# Altium PCB mimx8mn1dvtjzaa.PcbDoc
Units mil, origin at the board's own origin, x right, y up, seen from the top; angles counter-clockwise.
Board outline 6000 x 4000 mil, 2 copper layers (Top Layer, Bottom Layer); 39 components, 35 nets, 966 pads, 0 vias.
Unrouted connection lines stored in the file: 276.
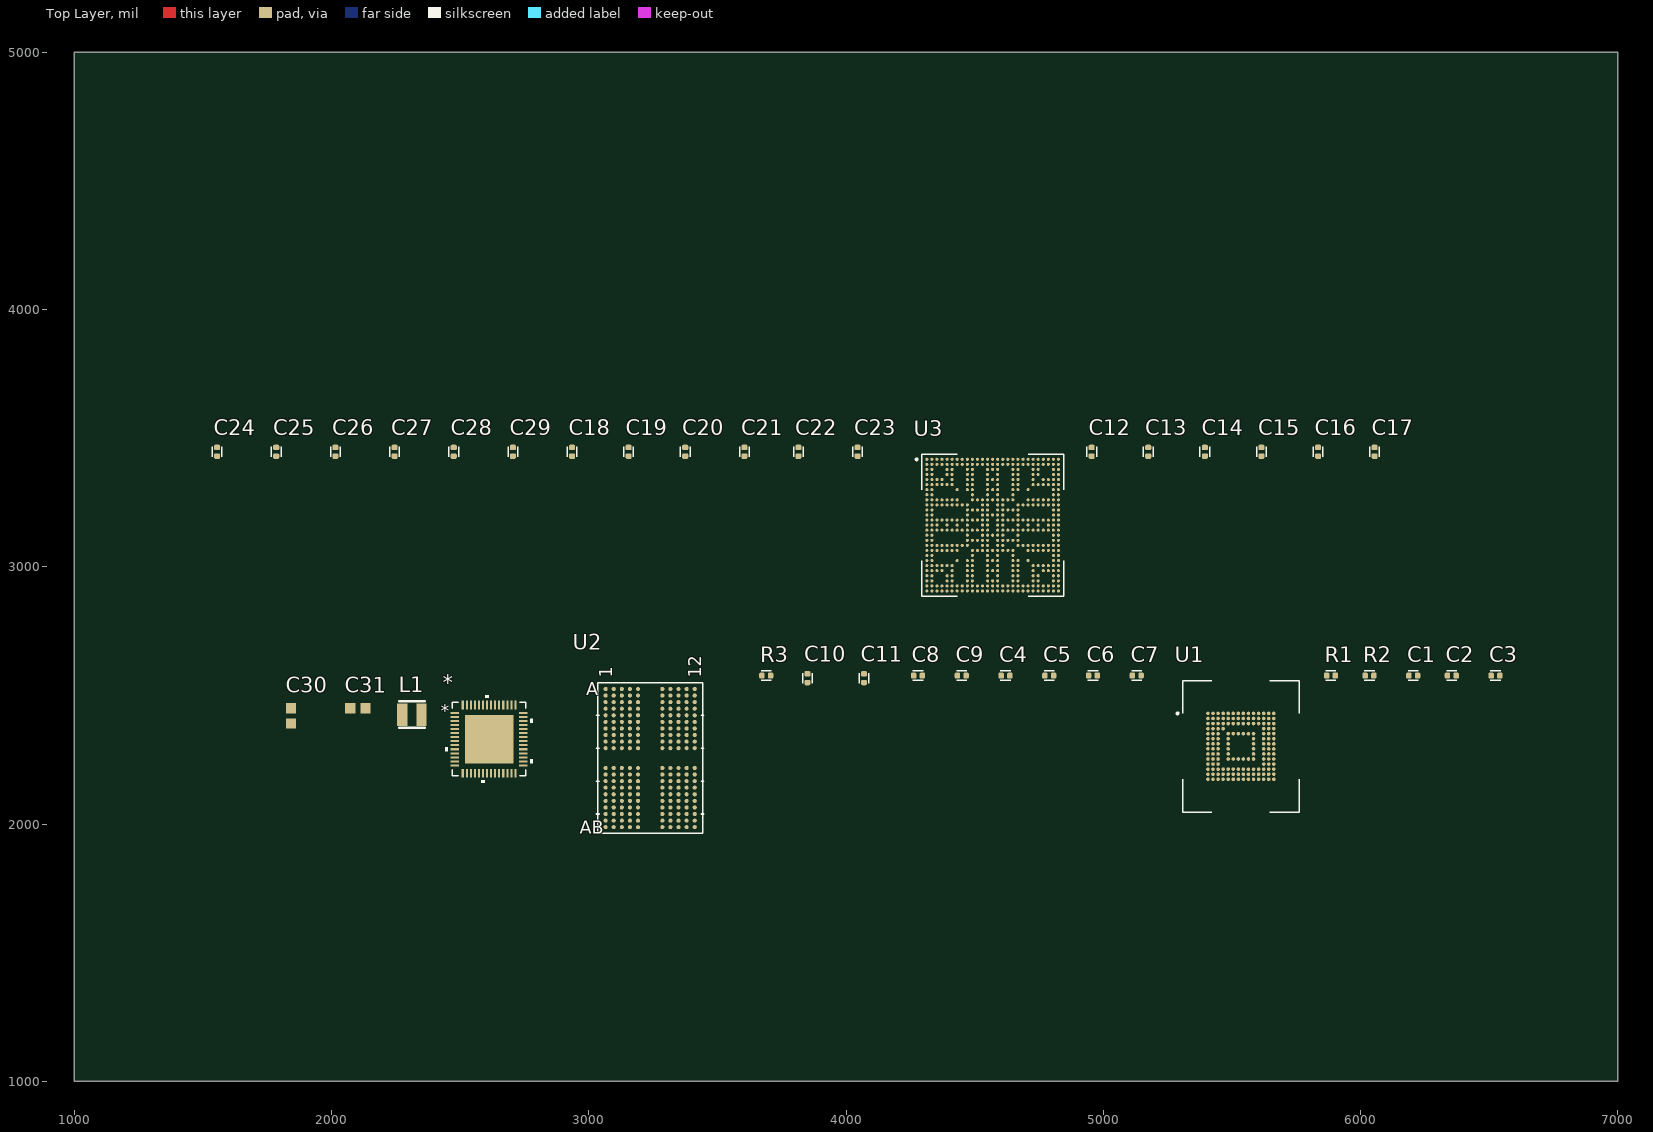
[diagram p0: Top Layer view]
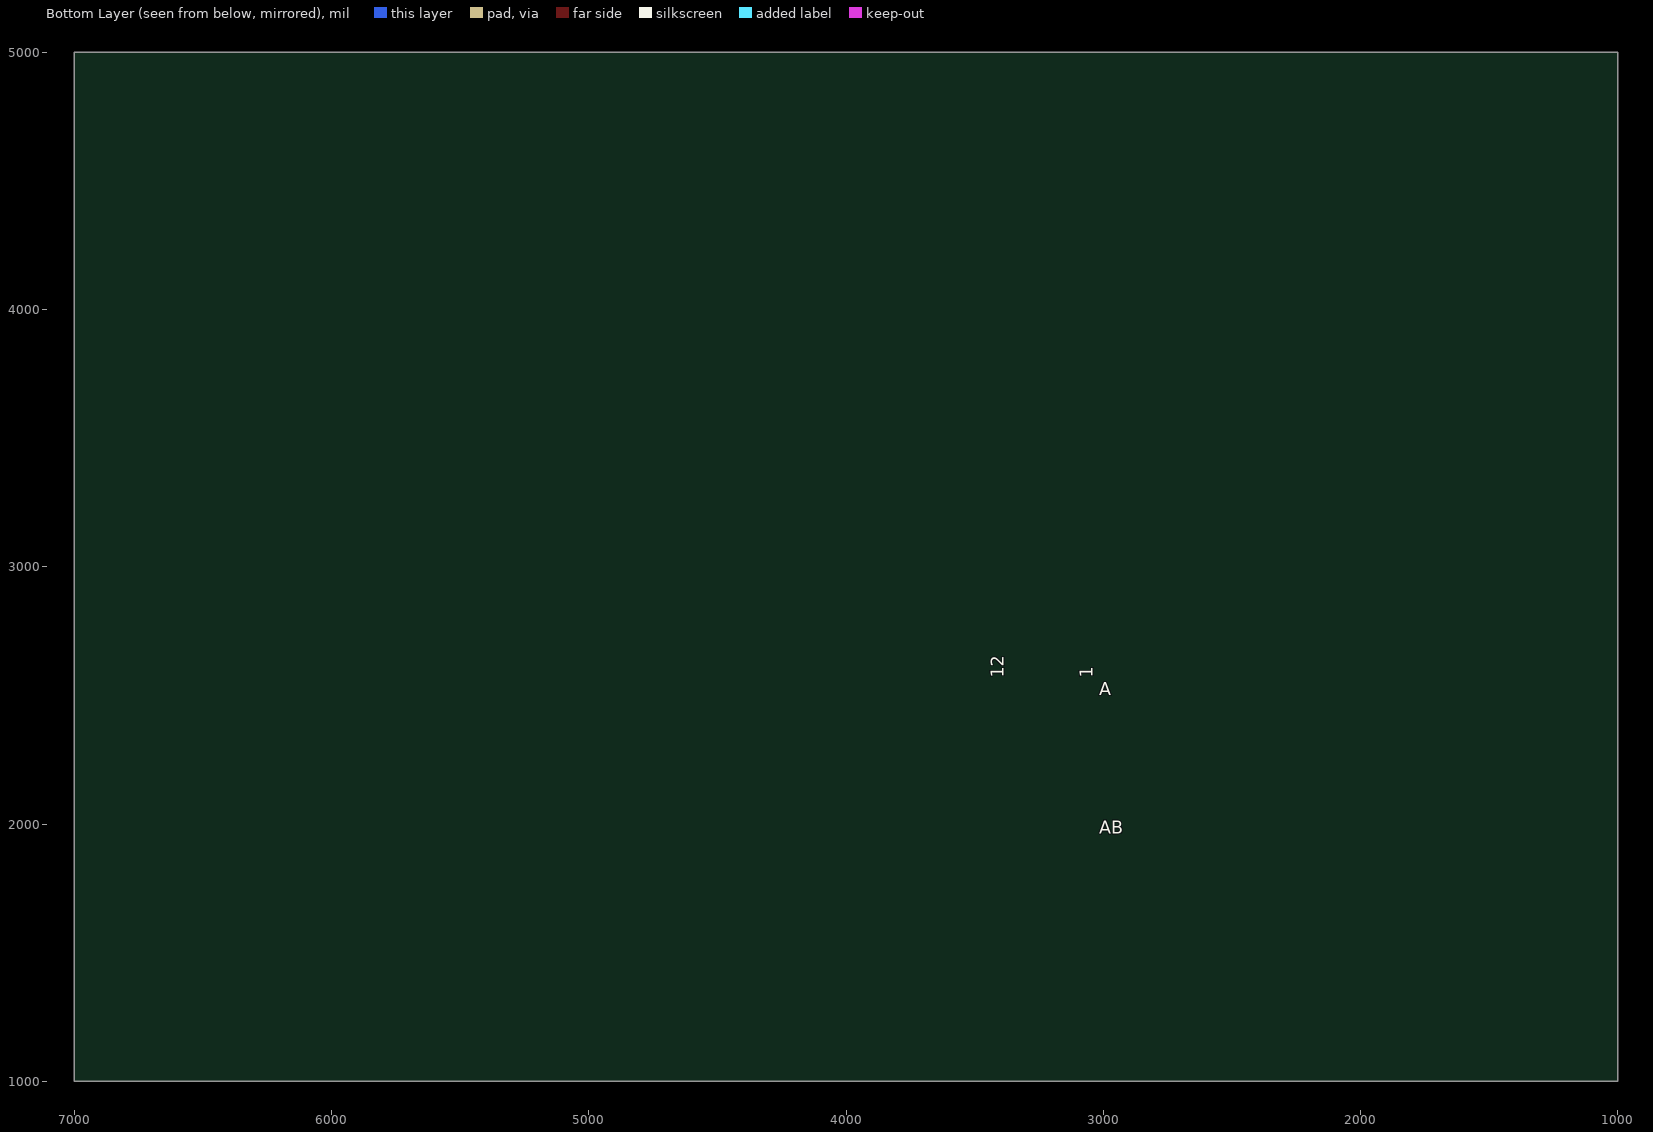
[diagram p1: Bottom Layer view, seen from below]

## Layer stack, top to bottom
Top Solder: solder mask 0.4, Solder Resist, Dk 3.5
Top Layer: signal copper 1.4
Dielectric 1: dielectric 12.6, FR-4, Dk 4.8
Bottom Layer: signal copper 1.4
Bottom Solder: solder mask 0.4, Solder Resist, Dk 3.5

## Board outline
1000,1000 7000,1000 7000,5000 1000,5000

## Design rules (kind name [scope] priority, off if disabled: settings)
Clearance [All] p1: gap=1 ignorepadtopadclearanceinfootprint=FALSE
PolygonConnect [All] p1: connectstyle=Relief reliefconductorwidth=10 reliefentries=4 polygonreliefangle="90 Angle" airgapwidth=10
RoomDefinition PMIC [InComponentClass('PMIC')] p1: confinementstyle=ConfineIn formatcopy=TRUE lockcomponents=FALSE outline 1802.42,2155 2787.42,2155 2787.42,2590 1802.42,2590
RoomDefinition mpu_power [InComponentClass('mpu_power')] p2: confinementstyle=ConfineIn formatcopy=TRUE lockcomponents=FALSE outline 1525,2836.93 6210,2836.93 6210,3586.93 1525,3586.93
RoomDefinition LPDDR4 [InComponentClass('LPDDR4')] p3: confinementstyle=ConfineIn formatcopy=TRUE lockcomponents=FALSE outline 2918.74,1946.31 3458.74,1946.31 3458.74,2756.3 2918.74,2756.3
RoomDefinition eMMC_QSPI [InComponentClass('eMMC_QSPI')] p4: confinementstyle=ConfineIn formatcopy=TRUE lockcomponents=FALSE outline 3650,1996.93 6620,1996.93 6620,2706.93 3650,2706.93
RoutingVias [All] p1: holewidth=28 width=50 viastyle="Through Hole" minholewidth=28 minwidth=50 maxholewidth=28 maxwidth=50
SolderMaskExpansion [All] p1: expansion=4 istentingtop=FALSE
Width [All] p1: maxlimit=5 minlimit=3 preferedwidth=5
30 further rules are at their usual default settings.

## Classes and differential pairs
component class PMIC: * C30 C31 L1
component class mpu_power: C12 C13 C14 C15 C16 C17 C18 C19 C20 C21 C22 C23 C24 C25 C26 C27 C28 C29 U3
component class LPDDR4: U2
component class eMMC_QSPI: C1 C2 C3 C4 C5 C6 C7 C8 C9 C10 C11 R1 R2 R3 TP16 TP17 TP18 TP34 TP35 TP36 TP40 U1 U5

## Components (designator, comment, footprint, x,y, rotation, side; value= is the part's Value field where it differs from the comment)
* "PCA9450BHNY" HVQFN56_SOT949-6_NXP 2612.42,2330 r0 top
C1 "475" CAPC1005X55N2 6205,2576.93 r0 top
C2 "475" CAPC1005X55N2 6355,2576.93 r0 top
C3 "475" CAPC1005X55N2 6525,2576.93 r0 top
C4 "475" CAPC1005X55N2 4620,2576.93 r0 top
C5 "475" CAPC1005X55N2 4790,2576.93 r0 top
C6 "475" CAPC1005X55N2 4960,2576.93 r0 top
C7 "475" CAPC1005X55N2 5130,2576.93 r0 top
C8 "475" CAPC1005X55N2 4280,2576.93 r0 top
C9 "475" CAPC1005X55N2 4450,2576.93 r0 top
C10 "104" CAPC1005X55N2 3850,2566.93 r90 top
C11 "104" CAPC1005X55N2 4070,2566.93 r90 top
C12 "105" RC0402 4955,3446.93 r90 top
C13 "105" RC0402 5175,3446.93 r90 top
C14 "105" RC0402 5395,3446.93 r90 top
C15 "105" RC0402 5615,3446.93 r90 top
C16 "105" RC0402 5835,3446.93 r90 top
C17 "106" CL05A106MQ5NUNC 6055,3446.93 r90 top
C18 "105" RC0402 2935,3446.93 r90 top
C19 "105" RC0402 3155,3446.93 r90 top
C20 "105" RC0402 3375,3446.93 r90 top
C21 "105" RC0402 3605,3446.93 r90 top
C22 "105" RC0402 3815,3446.93 r90 top
C23 "106" CL05A106MQ5NUNC 4045,3446.93 r90 top
C24 "105" RC0402 1555,3446.93 r90 top
C25 "105" RC0402 1785,3446.93 r90 top
C26 "105" RC0402 2015,3446.93 r90 top
C27 "105" RC0402 2245,3446.93 r90 top
C28 "105" RC0402 2475,3446.93 r90 top
C29 "106" CL05A106MQ5NUNC 2705,3446.93 r90 top
C30 "22uF 10v" CAPC1608X100N 1842.42,2420 r90 top
C31 "22uF 10v" CAPC1608X100N 2102.42,2450 r0 top
L1 "DFE252012PD-R47M=P2" IND-SMD_L2.5-W2.0_SWPA252012S 2312.42,2425 r0 top
R1 "10k" RC0402X 5885,2576.93 r0 top
R2 "10k" RC0402X 6035,2576.93 r0 top
R3 "10k" RC0402X 3690,2576.93 r0 top
U1 "SDINBDG4-16G_VFBGA_153P" BGA153N50P14X14_1300X1150X80 5535,2301.93 r0 top
U2 "MT53E256M16D1FW-046 AIT:B" TFBGA200_10X14P5X1P1_FW_MRN-M 3238.74,2256.3 r0 top
U3 "MIMX8MN6DVTJZAA" BGA486N50P27X27_1400X1400X125N 4570,3161.93 r0 top

## Footprints (in the part's own frame and the unit in brackets; to place one, negate y for a bottom-side part, rotate by r counter-clockwise, add the part's x,y. Pads: shape width x height; smd on the part's side, far side on the other; paste and mask are expansions set on the pad)
BGA153N50P14X14_1300X1150X80 [mm]
  round 0.35 smd: A1(-3.25,3.25) A2(-2.75,3.25) A3(-2.25,3.25) A4(-1.75,3.25) A5(-1.25,3.25) A6(-0.75,3.25) A7(-0.25,3.25) A8(0.25,3.25) A9(0.75,3.25) A10(1.25,3.25) A11(1.75,3.25) A12(2.25,3.25) A13(2.75,3.25) A14(3.25,3.25) B1(-3.25,2.75) B2(-2.75,2.75) B3(-2.25,2.75) B4(-1.75,2.75) B5(-1.25,2.75) B6(-0.75,2.75) B7(-0.25,2.75) B8(0.25,2.75) B9(0.75,2.75) B10(1.25,2.75) B11(1.75,2.75) B12(2.25,2.75) B13(2.75,2.75) B14(3.25,2.75) C1(-3.25,2.25) C2(-2.75,2.25) C3(-2.25,2.25) C4(-1.75,2.25) C5(-1.25,2.25) C6(-0.75,2.25) C7(-0.25,2.25) C8(0.25,2.25) C9(0.75,2.25) C10(1.25,2.25) C11(1.75,2.25) C12(2.25,2.25) C13(2.75,2.25) C14(3.25,2.25) D1(-3.25,1.75) D2(-2.75,1.75) D3(-2.25,1.75) D4(-1.75,1.75) D12(2.25,1.75) D13(2.75,1.75) D14(3.25,1.75) E1(-3.25,1.25) E2(-2.75,1.25) E3(-2.25,1.25) E5(-1.25,1.25) E6(-0.75,1.25) E7(-0.25,1.25) E8(0.25,1.25) E9(0.75,1.25) E10(1.25,1.25) E12(2.25,1.25) E13(2.75,1.25) E14(3.25,1.25) F1(-3.25,0.75) F2(-2.75,0.75) F3(-2.25,0.75) F5(-1.25,0.75) F10(1.25,0.75) F12(2.25,0.75) F13(2.75,0.75) F14(3.25,0.75) G1(-3.25,0.25) G2(-2.75,0.25) G3(-2.25,0.25) G5(-1.25,0.25) G10(1.25,0.25) G12(2.25,0.25) G13(2.75,0.25) G14(3.25,0.25) H1(-3.25,-0.25) H2(-2.75,-0.25) H3(-2.25,-0.25) H5(-1.25,-0.25) H10(1.25,-0.25) H12(2.25,-0.25) H13(2.75,-0.25) H14(3.25,-0.25) J1(-3.25,-0.75) J2(-2.75,-0.75) J3(-2.25,-0.75) J5(-1.25,-0.75) J10(1.25,-0.75) J12(2.25,-0.75) J13(2.75,-0.75) J14(3.25,-0.75) K1(-3.25,-1.25) K2(-2.75,-1.25) K3(-2.25,-1.25) K5(-1.25,-1.25) K6(-0.75,-1.25) K7(-0.25,-1.25) K8(0.25,-1.25) K9(0.75,-1.25) K10(1.25,-1.25) K12(2.25,-1.25) K13(2.75,-1.25) K14(3.25,-1.25) L1(-3.25,-1.75) L2(-2.75,-1.75) L3(-2.25,-1.75) L12(2.25,-1.75) L13(2.75,-1.75) L14(3.25,-1.75) M1(-3.25,-2.25) M2(-2.75,-2.25) M3(-2.25,-2.25) M4(-1.75,-2.25) M5(-1.25,-2.25) M6(-0.75,-2.25) M7(-0.25,-2.25) M8(0.25,-2.25) M9(0.75,-2.25) M10(1.25,-2.25) M11(1.75,-2.25) M12(2.25,-2.25) M13(2.75,-2.25) M14(3.25,-2.25) N1(-3.25,-2.75) N2(-2.75,-2.75) N3(-2.25,-2.75) N4(-1.75,-2.75) N5(-1.25,-2.75) N6(-0.75,-2.75) N7(-0.25,-2.75) N8(0.25,-2.75) N9(0.75,-2.75) N10(1.25,-2.75) N11(1.75,-2.75) N12(2.25,-2.75) N13(2.75,-2.75) N14(3.25,-2.75) P1(-3.25,-3.25) P2(-2.75,-3.25) P3(-2.25,-3.25) P4(-1.75,-3.25) P5(-1.25,-3.25) P6(-0.75,-3.25) P7(-0.25,-3.25) P8(0.25,-3.25) P9(0.75,-3.25) P10(1.25,-3.25) P11(1.75,-3.25) P12(2.25,-3.25) P13(2.75,-3.25) P14(3.25,-3.25)
  silkscreen extent -6.35,-6.5 5.75,6.5
BGA486N50P27X27_1400X1400X125N [mil]
  round 12 smd mask+0: A1(-255.91,255.91) A2(-236.22,255.91) A3(-216.54,255.91) A4(-196.85,255.91) A5(-177.17,255.91) A6(-157.48,255.91) A7(-137.8,255.91) A8(-118.11,255.91) A9(-98.43,255.91) A10(-78.74,255.91) A11(-59.06,255.91) A12(-39.37,255.91) A13(-19.69,255.91) A14(0,255.91) A15(19.69,255.91) A16(39.37,255.91) A17(59.06,255.91) A18(78.74,255.91) A19(98.43,255.91) A20(118.11,255.91) A21(137.8,255.91) A22(157.48,255.91) A23(177.17,255.91) A24(196.85,255.91) A25(216.54,255.91) A26(236.22,255.91) A27(255.91,255.91) AA1(-255.91,-137.8) AA2(-236.22,-137.8) AA7(-137.8,-137.8) AA9(-98.43,-137.8) AA10(-78.74,-137.8) AA13(-19.69,-137.8) AA14(0,-137.8) AA15(19.69,-137.8) AA18(78.74,-137.8) AA19(98.43,-137.8) AA21(137.8,-137.8) AA26(236.22,-137.8) AA27(255.91,-137.8) AB1(-255.91,-157.48) AB2(-236.22,-157.48) AB3(-216.54,-157.48) AB4(-196.85,-157.48) AB5(-177.17,-157.48) AB6(-157.48,-157.48) AB9(-98.43,-157.48) AB10(-78.74,-157.48) AB13(-19.69,-157.48) AB15(19.69,-157.48) AB18(78.74,-157.48) AB19(98.43,-157.48) AB22(157.48,-157.48) AB23(177.17,-157.48) AB24(196.85,-157.48) AB25(216.54,-157.48) AB26(236.22,-157.48) AB27(255.91,-157.48) AC1(-255.91,-177.17) AC2(-236.22,-177.17) AC3(-216.54,-177.17) AC4(-196.85,-177.17) AC6(-157.48,-177.17) AC9(-98.43,-177.17) AC10(-78.74,-177.17) AC13(-19.69,-177.17) AC14(0,-177.17) AC15(19.69,-177.17) AC18(78.74,-177.17) AC19(98.43,-177.17) AC22(157.48,-177.17) AC24(196.85,-177.17) AC25(216.54,-177.17) AC26(236.22,-177.17) AC27(255.91,-177.17) AD1(-255.91,-196.85) AD2(-236.22,-196.85) AD5(-177.17,-196.85) AD6(-157.48,-196.85) AD9(-98.43,-196.85) AD10(-78.74,-196.85) AD13(-19.69,-196.85) AD15(19.69,-196.85) AD18(78.74,-196.85) AD19(98.43,-196.85) AD22(157.48,-196.85) AD23(177.17,-196.85) AD26(236.22,-196.85) AD27(255.91,-196.85) AE1(-255.91,-216.54) AE2(-236.22,-216.54) AE5(-177.17,-216.54) AE6(-157.48,-216.54) AE9(-98.43,-216.54) AE10(-78.74,-216.54) AE13(-19.69,-216.54) AE14(0,-216.54) AE15(19.69,-216.54) AE18(78.74,-216.54) AE19(98.43,-216.54) AE22(157.48,-216.54) AE23(177.17,-216.54) AE26(236.22,-216.54) AE27(255.91,-216.54) AF1(-255.91,-236.22) AF2(-236.22,-236.22) AF3(-216.54,-236.22) AF4(-196.85,-236.22) AF5(-177.17,-236.22) AF6(-157.48,-236.22) AF7(-137.8,-236.22) AF8(-118.11,-236.22) AF9(-98.43,-236.22) AF10(-78.74,-236.22) AF11(-59.06,-236.22) AF12(-39.37,-236.22) AF13(-19.69,-236.22) AF14(0,-236.22) AF15(19.69,-236.22) AF16(39.37,-236.22) AF17(59.06,-236.22) AF18(78.74,-236.22) AF19(98.43,-236.22) AF20(118.11,-236.22) AF21(137.8,-236.22) AF22(157.48,-236.22) AF23(177.17,-236.22) AF24(196.85,-236.22) AF25(216.54,-236.22) AF26(236.22,-236.22) AF27(255.91,-236.22) AG1(-255.91,-255.91) AG2(-236.22,-255.91) AG3(-216.54,-255.91) AG4(-196.85,-255.91) AG5(-177.17,-255.91) AG6(-157.48,-255.91) AG7(-137.8,-255.91) AG8(-118.11,-255.91) AG9(-98.43,-255.91) AG10(-78.74,-255.91) AG11(-59.06,-255.91) AG12(-39.37,-255.91) AG13(-19.69,-255.91) AG14(0,-255.91) AG15(19.69,-255.91) AG16(39.37,-255.91) AG17(59.06,-255.91) AG18(78.74,-255.91) AG19(98.43,-255.91) AG20(118.11,-255.91) AG21(137.8,-255.91) AG22(157.48,-255.91) AG23(177.17,-255.91) AG24(196.85,-255.91) AG25(216.54,-255.91) AG26(236.22,-255.91) AG27(255.91,-255.91) B1(-255.91,236.22) B2(-236.22,236.22) B3(-216.54,236.22) B4(-196.85,236.22) B5(-177.17,236.22) B6(-157.48,236.22) B7(-137.8,236.22) B8(-118.11,236.22) B9(-98.43,236.22) B10(-78.74,236.22) B11(-59.06,236.22) B12(-39.37,236.22) B13(-19.69,236.22) B14(0,236.22) B15(19.69,236.22) B16(39.37,236.22) B17(59.06,236.22) B18(78.74,236.22) B19(98.43,236.22) B20(118.11,236.22) B21(137.8,236.22) B22(157.48,236.22) B23(177.17,236.22) B24(196.85,236.22) B25(216.54,236.22) B26(236.22,236.22) B27(255.91,236.22) C1(-255.91,216.54) C2(-236.22,216.54) C5(-177.17,216.54) C6(-157.48,216.54) C9(-98.43,216.54) C10(-78.74,216.54) C13(-19.69,216.54) C14(0,216.54) C15(19.69,216.54) C18(78.74,216.54) C19(98.43,216.54) C22(157.48,216.54) C23(177.17,216.54) C26(236.22,216.54) C27(255.91,216.54) D1(-255.91,196.85) D2(-236.22,196.85) D5(-177.17,196.85) D6(-157.48,196.85) D9(-98.43,196.85) D10(-78.74,196.85) D13(-19.69,196.85) D15(19.69,196.85) D18(78.74,196.85) D19(98.43,196.85) D22(157.48,196.85) D23(177.17,196.85) D26(236.22,196.85) D27(255.91,196.85) E1(-255.91,177.17) E2(-236.22,177.17) E3(-216.54,177.17) E4(-196.85,177.17) E6(-157.48,177.17) E9(-98.43,177.17) E10(-78.74,177.17) E13(-19.69,177.17) E14(0,177.17) E15(19.69,177.17) E18(78.74,177.17) E19(98.43,177.17) E22(157.48,177.17) E24(196.85,177.17) E25(216.54,177.17) E26(236.22,177.17) E27(255.91,177.17) F1(-255.91,157.48) F2(-236.22,157.48) F3(-216.54,157.48) F4(-196.85,157.48) F5(-177.17,157.48) F6(-157.48,157.48) F9(-98.43,157.48) F10(-78.74,157.48) F13(-19.69,157.48) F15(19.69,157.48) F18(78.74,157.48) F19(98.43,157.48) F22(157.48,157.48) F23(177.17,157.48) F24(196.85,157.48) F25(216.54,157.48) F26(236.22,157.48) F27(255.91,157.48) G1(-255.91,137.8) G2(-236.22,137.8) G7(-137.8,137.8) G9(-98.43,137.8) G10(-78.74,137.8) G13(-19.69,137.8) G14(0,137.8) G15(19.69,137.8) G18(78.74,137.8) G19(98.43,137.8) G21(137.8,137.8) G26(236.22,137.8) G27(255.91,137.8) H1(-255.91,118.11) H2(-236.22,118.11) H10(-78.74,118.11) H13(-19.69,118.11) H15(19.69,118.11) H18(78.74,118.11) H26(236.22,118.11) H27(255.91,118.11) J1(-255.91,98.43) J2(-236.22,98.43) J3(-216.54,98.43) J4(-196.85,98.43) J5(-177.17,98.43) J6(-157.48,98.43) J7(-137.8,98.43) J10(-78.74,98.43) J11(-59.06,98.43) J12(-39.37,98.43) J13(-19.69,98.43) J14(0,98.43) J15(19.69,98.43) J16(39.37,98.43) J17(59.06,98.43) J18(78.74,98.43) J21(137.8,98.43) J22(157.48,98.43) J23(177.17,98.43) J24(196.85,98.43) J25(216.54,98.43) J26(236.22,98.43) J27(255.91,98.43) K1(-255.91,78.74) K2(-236.22,78.74) K3(-216.54,78.74) K4(-196.85,78.74) K5(-177.17,78.74) K6(-157.48,78.74) K7(-137.8,78.74) K8(-118.11,78.74) K9(-98.43,78.74) K12(-39.37,78.74) K13(-19.69,78.74) K15(19.69,78.74) K16(39.37,78.74) K19(98.43,78.74) K20(118.11,78.74) K21(137.8,78.74) K22(157.48,78.74) K23(177.17,78.74) K24(196.85,78.74) K25(216.54,78.74) K26(236.22,78.74) K27(255.91,78.74) L1(-255.91,59.06) L2(-236.22,59.06) L9(-98.43,59.06) L10(-78.74,59.06) L11(-59.06,59.06) L12(-39.37,59.06) L13(-19.69,59.06) L15(19.69,59.06) L16(39.37,59.06) L17(59.06,59.06) L18(78.74,59.06) L19(98.43,59.06) L26(236.22,59.06) L27(255.91,59.06) M1(-255.91,39.37) M2(-236.22,39.37) M9(-98.43,39.37) M12(-39.37,39.37) M13(-19.69,39.37) M14(0,39.37) M15(19.69,39.37) M16(39.37,39.37) M19(98.43,39.37) M26(236.22,39.37) M27(255.91,39.37) N1(-255.91,19.68) N2(-236.22,19.68) N3(-216.54,19.68) N4(-196.85,19.68) N5(-177.17,19.68) N6(-157.48,19.68) N7(-137.8,19.68) N8(-118.11,19.68) N9(-98.43,19.68) N10(-78.74,19.68) N11(-59.06,19.68) N12(-39.37,19.68) N13(-19.69,19.68) N15(19.69,19.68) N16(39.37,19.68) N17(59.06,19.68) N18(78.74,19.68) N19(98.43,19.68) N20(118.11,19.68) N21(137.8,19.68) N22(157.48,19.68) N23(177.17,19.68) N24(196.85,19.68) N25(216.54,19.68) N26(236.22,19.68) N27(255.91,19.68) P1(-255.91,0) P2(-236.22,0) P3(-216.54,0) P5(-177.17,0) P7(-137.8,0) P9(-98.43,0) P12(-39.37,0) P13(-19.69,0) P15(19.69,0) P16(39.37,0) P19(98.43,0) P21(137.8,0) P23(177.17,0) P25(216.54,0) P26(236.22,0) P27(255.91,0) R1(-255.91,-19.68) R2(-236.22,-19.68) R3(-216.54,-19.68) R4(-196.85,-19.68) R5(-177.17,-19.68) R6(-157.48,-19.68) R7(-137.8,-19.68) R8(-118.11,-19.68) R9(-98.43,-19.68) R10(-78.74,-19.68) R11(-59.06,-19.68) R12(-39.37,-19.68) R13(-19.69,-19.68) R15(19.69,-19.68) R16(39.37,-19.68) R17(59.06,-19.68) R18(78.74,-19.68) R19(98.43,-19.68) R20(118.11,-19.68) R21(137.8,-19.68) R22(157.48,-19.68) R23(177.17,-19.68) R24(196.85,-19.68) R25(216.54,-19.68) R26(236.22,-19.68) R27(255.91,-19.68) T1(-255.91,-39.37) T2(-236.22,-39.37) T9(-98.43,-39.37) T12(-39.37,-39.37) T13(-19.69,-39.37) T14(0,-39.37) T15(19.69,-39.37) T16(39.37,-39.37) T19(98.43,-39.37) T26(236.22,-39.37) T27(255.91,-39.37) U1(-255.91,-59.06) U2(-236.22,-59.06) U9(-98.43,-59.06) U10(-78.74,-59.06) U11(-59.06,-59.06) U12(-39.37,-59.06) U13(-19.69,-59.06) U15(19.69,-59.06) U16(39.37,-59.06) U17(59.06,-59.06) U18(78.74,-59.06) U19(98.43,-59.06) U26(236.22,-59.06) U27(255.91,-59.06) V1(-255.91,-78.74) V2(-236.22,-78.74) V3(-216.54,-78.74) V4(-196.85,-78.74) V5(-177.17,-78.74) V6(-157.48,-78.74) V7(-137.8,-78.74) V8(-118.11,-78.74) V9(-98.43,-78.74) V12(-39.37,-78.74) V13(-19.69,-78.74) V15(19.69,-78.74) V16(39.37,-78.74) V19(98.43,-78.74) V20(118.11,-78.74) V21(137.8,-78.74) V22(157.48,-78.74) V23(177.17,-78.74) V24(196.85,-78.74) V25(216.54,-78.74) V26(236.22,-78.74) V27(255.91,-78.74) W1(-255.91,-98.43) W2(-236.22,-98.43) W3(-216.54,-98.43) W4(-196.85,-98.43) W5(-177.17,-98.43) W6(-157.48,-98.43) W7(-137.8,-98.43) W10(-78.74,-98.43) W11(-59.06,-98.43) W12(-39.37,-98.43) W13(-19.69,-98.43) W14(0,-98.43) W15(19.69,-98.43) W16(39.37,-98.43) W17(59.06,-98.43) W18(78.74,-98.43) W21(137.8,-98.43) W22(157.48,-98.43) W23(177.17,-98.43) W24(196.85,-98.43) W25(216.54,-98.43) W26(236.22,-98.43) W27(255.91,-98.43) Y1(-255.91,-118.11) Y2(-236.22,-118.11) Y10(-78.74,-118.11) Y13(-19.69,-118.11) Y15(19.69,-118.11) Y18(78.74,-118.11) Y26(236.22,-118.11) Y27(255.91,-118.11)
  silkscreen extent -299,-276 276,276
CAPC1005X55N2 [mm]
  rrect53% 0.54x0.6 smd: 1(-0.43,0) 2(0.43,0)
  silkscreen extent -0.5,-0.48 0.5,0.48, body extent -0.52,-0.28 0.52,0.28, height 0.56
CAPC1608X100N [mm]
  rect 1x1.02 smd: 1(-0.759,0) 2(0.759,0)
  body extent -0.8,-0.4 0.8,0.4, height 1
CL05A106MQ5NUNC [mm]
  rrect53% 0.54x0.6 smd: 1(-0.43,0) 2(0.43,0)
  silkscreen extent -0.5,-0.48 0.5,0.48
HVQFN56_SOT949-6_NXP [mil]
  rect 34x8 smd paste+0 mask+0: 1(-133,102.36) 2(-133,86.61) 3(-133,70.87) 4(-133,55.12) 5(-133,39.37) 6(-133,23.62) 7(-133,7.87) 8(-133,-7.87) 9(-133,-23.62) 10(-133,-39.37) 11(-133,-55.12) 12(-133,-70.87) 13(-133,-86.61) 14(-133,-102.36) 29(133,-102.36) 30(133,-86.61) 31(133,-70.87) 32(133,-55.12) 33(133,-39.37) 34(133,-23.62) 35(133,-7.87) 36(133,7.87) 37(133,23.62) 38(133,39.37) 39(133,55.12) 40(133,70.87) 41(133,86.61) 42(133,102.36)
  rect 8x34 smd paste+0 mask+0: 15(-102.36,-133) 16(-86.61,-133) 17(-70.87,-133) 18(-55.12,-133) 19(-39.37,-133) 20(-23.62,-133) 21(-7.87,-133) 22(7.87,-133) 23(23.62,-133) 24(39.37,-133) 25(55.12,-133) 26(70.87,-133) 27(86.61,-133) 28(102.36,-133) 43(102.36,133) 44(86.61,133) 45(70.87,133) 46(55.12,133) 47(39.37,133) 48(23.62,133) 49(7.87,133) 50(-7.87,133) 51(-23.62,133) 52(-39.37,133) 53(-55.12,133) 54(-70.87,133) 55(-86.61,133) 56(-102.36,133)
  rect 189x189 smd paste-94.5 mask+0: 57(0,0)
  silkscreen extent -170,-170 170,170, body extent -138,-138 138,138, height 39
IND-SMD_L2.5-W2.0_SWPA252012S [mm]
  rect 1x2.2 smd: 1(-0.95,0) 2(0.95,0)
  silkscreen extent -1.24,-1.3 1.26,1.32, body extent -1.25,-1 1.25,1, height 1.2
RC0402 [mm]
  rrect53% 0.54x0.6 smd: 1(-0.43,0) 2(0.43,0)
  silkscreen extent -0.5,-0.48 0.5,0.48, body extent -0.52,-0.28 0.52,0.28, height 0.56
RC0402X [mm]
  rrect53% 0.54x0.6 smd: 1(-0.43,0) 2(0.43,0)
  silkscreen extent -0.5,-0.48 0.5,0.48, body extent -0.5,-0.25 0.5,0.25, height 0.4
TFBGA200_10X14P5X1P1_FW_MRN-M [mil]
  round 16 smd paste+0 mask+0: A1(-173.23,268.7) A2(-141.73,268.7) A3(-110.24,268.7) A4(-78.74,268.7) A5(-47.24,268.7) A8(47.24,268.7) A9(78.74,268.7) A10(110.24,268.7) A11(141.73,268.7) A12(173.23,268.7) AA1(-173.23,-243.1) AA2(-141.73,-243.1) AA3(-110.24,-243.1) AA4(-78.74,-243.1) AA5(-47.24,-243.1) AA8(47.24,-243.1) AA9(78.74,-243.1) AA10(110.24,-243.1) AA11(141.73,-243.1) AA12(173.23,-243.1) AB1(-173.23,-268.69) AB2(-141.73,-268.69) AB3(-110.24,-268.69) AB4(-78.74,-268.69) AB5(-47.24,-268.69) AB8(47.24,-268.69) AB9(78.74,-268.69) AB10(110.24,-268.69) AB11(141.73,-268.69) AB12(173.23,-268.69) B1(-173.23,243.11) B2(-141.73,243.11) B3(-110.24,243.11) B4(-78.74,243.11) B5(-47.24,243.11) B8(47.24,243.11) B9(78.74,243.11) B10(110.24,243.11) B11(141.73,243.11) B12(173.23,243.11) C1(-173.23,217.52) C2(-141.73,217.52) C3(-110.24,217.52) C4(-78.74,217.52) C5(-47.24,217.52) C8(47.24,217.52) C9(78.74,217.52) C10(110.24,217.52) C11(141.73,217.52) C12(173.23,217.52) D1(-173.23,191.93) D2(-141.73,191.93) D3(-110.24,191.93) D4(-78.74,191.93) D5(-47.24,191.93) D8(47.24,191.93) D9(78.74,191.93) D10(110.24,191.93) D11(141.73,191.93) D12(173.23,191.93) E1(-173.23,166.34) E2(-141.73,166.34) E3(-110.24,166.34) E4(-78.74,166.34) E5(-47.24,166.34) E8(47.24,166.34) E9(78.74,166.34) E10(110.24,166.34) E11(141.73,166.34) E12(173.23,166.34) F1(-173.23,140.75) F2(-141.73,140.75) F3(-110.24,140.75) F4(-78.74,140.75) F5(-47.24,140.75) F8(47.24,140.75) F9(78.74,140.75) F10(110.24,140.75) F11(141.73,140.75) F12(173.23,140.75) G1(-173.23,115.16) G2(-141.73,115.16) G3(-110.24,115.16) G4(-78.74,115.16) G5(-47.24,115.16) G8(47.24,115.16) G9(78.74,115.16) G10(110.24,115.16) G11(141.73,115.16) G12(173.23,115.16) H1(-173.23,89.57) H2(-141.73,89.57) H3(-110.24,89.57) H4(-78.74,89.57) H5(-47.24,89.57) H8(47.24,89.57) H9(78.74,89.57) H10(110.24,89.57) H11(141.73,89.57) H12(173.23,89.57) J1(-173.23,63.98) J2(-141.73,63.98) J3(-110.24,63.98) J4(-78.74,63.98) J5(-47.24,63.98) J8(47.24,63.98) J9(78.74,63.98) J10(110.24,63.98) J11(141.73,63.98) J12(173.23,63.98) K1(-173.23,38.39) K2(-141.73,38.39) K3(-110.24,38.39) K4(-78.74,38.39) K5(-47.24,38.39) K8(47.24,38.39) K9(78.74,38.39) K10(110.24,38.39) K11(141.73,38.39) K12(173.23,38.39) N1(-173.23,-38.38) N2(-141.73,-38.38) N3(-110.24,-38.38) N4(-78.74,-38.38) N5(-47.24,-38.38) N8(47.24,-38.38) N9(78.74,-38.38) N10(110.24,-38.38) N11(141.73,-38.38) N12(173.23,-38.38) P1(-173.23,-63.97) P2(-141.73,-63.97) P3(-110.24,-63.97) P4(-78.74,-63.97) P5(-47.24,-63.97) P8(47.24,-63.97) P9(78.74,-63.97) P10(110.24,-63.97) P11(141.73,-63.97) P12(173.23,-63.97) R1(-173.23,-89.57) R2(-141.73,-89.57) R3(-110.24,-89.57) R4(-78.74,-89.57) R5(-47.24,-89.57) R8(47.24,-89.57) R9(78.74,-89.57) R10(110.24,-89.57) R11(141.73,-89.57) R12(173.23,-89.57) T1(-173.23,-115.15) T2(-141.73,-115.15) T3(-110.24,-115.15) T4(-78.74,-115.15) T5(-47.24,-115.15) T8(47.24,-115.15) T9(78.74,-115.15) T10(110.24,-115.15) T11(141.73,-115.15) T12(173.23,-115.15) U1(-173.23,-140.74) U2(-141.73,-140.74) U3(-110.24,-140.74) U4(-78.74,-140.74) U5(-47.24,-140.74) U8(47.24,-140.74) U9(78.74,-140.74) U10(110.24,-140.74) U11(141.73,-140.74) U12(173.23,-140.74) V1(-173.23,-166.34) V2(-141.73,-166.34) V3(-110.24,-166.34) V4(-78.74,-166.34) V5(-47.24,-166.34) V8(47.24,-166.34) V9(78.74,-166.34) V10(110.24,-166.34) V11(141.73,-166.34) V12(173.23,-166.34) W1(-173.23,-191.92) W2(-141.73,-191.92) W3(-110.24,-191.92) W4(-78.74,-191.92) W5(-47.24,-191.92) W8(47.24,-191.92) W9(78.74,-191.92) W10(110.24,-191.92) W11(141.73,-191.92) W12(173.23,-191.92) Y1(-173.23,-217.51) Y2(-141.73,-217.51) Y3(-110.24,-217.51) Y4(-78.74,-217.51) Y5(-47.24,-217.51) Y8(47.24,-217.51) Y9(78.74,-217.51) Y10(110.24,-217.51) Y11(141.73,-217.51) Y12(173.23,-217.51)
  silkscreen extent -209,-292 209,292

## Part data
*: "Power Manage Ic (Pmic) For I.mx 8M Nano Rohs Compliant: Yes", Manufacturer="NXP Semiconductors", Supplier Part Number 1=568-PCA9450BHNYCT-ND, Category="Power Management ICs", ComponentLink1Description=https://datasheet.octopart.com/PCA9450BHNY-NXP-Semiconductors-datasheet-150009921.pdf?src-supplier=Future+Electronics, ComponentLink1URL=https://datasheet.octopart.com/PCA9450BHNY-NXP-Semiconductors-datasheet-150009921.pdf?src-supplier=Future+Electronics, Manufacturer Part Number=PCA9450BHNY, Pricing 1="1=5.66, 10=4.331, 25=3.9992, 100=3.6339, 250=3.45972, 500=3.35474, 1000=3.26833 (USD)", RoHS=No, RoHS Compliant=Yes, Stock 1=7995, Supplier 1=Digikey
C1 C2 C3 C4 C5 C6 C7 C8 C9: library part CC0402MRX5R6BB475, "Multilayer Ceramic Capacitor, 4.7 uF, 50 V, ï¿½ 10%, X5R, 0402 [1005 Metric]", Capacitance=4.7uF, Case Code (Imperial)=0402, Case Code (Metric)=1005, Dielectric=X5R, LCSC=C469468, Manufacturer=Yageo, Max Operating Temperature=85°C, Min Operating Temperature=-55°C, Package Quantity=10000, Supplier Part Number 1=311-1734-1-ND, Temperature Coefficient=30ppm/°C, Tolerance=20%, Voltage Rating=10V, Case/Package=0402, Category="Ceramic Capacitors", ComponentLink1Description=http://www.mouser.com/ds/2/447/Yageo_UPY-GP_NP0_16V-to-50V_9-358835.pdf?src-supplier=Mouser, ComponentLink1URL=http://www.mouser.com/ds/2/447/Yageo_UPY-GP_NP0_16V-to-50V_9-358835.pdf?src-supplier=Mouser, ComponentLink2Description=http://www.yageo.com/documents/recent/UPY-GPHC_X5R_4V-to-50V_25.pdf?src-supplier=Digikey, ComponentLink2URL=http://www.yageo.com/documents/recent/UPY-GPHC_X5R_4V-to-50V_25.pdf?src-supplier=Digikey, ComponentLink3Description=http://www.yageo.com/exep/pages/download/literatures/ProductSelectionGuide%202014_Final_2.pdf?src-supplier=Digikey, ComponentLink3URL=http://www.yageo.com/exep/pages/download/literatures/ProductSelectionGuide%202014_Final_2.pdf?src-supplier=Digikey, ComponentLink4Description=https://datasheet.octopart.com/CC0402MRX5R6BB475-Yageo-datasheet-140260304.pdf?src-supplier=Newark, ComponentLink4URL=https://datasheet.octopart.com/CC0402MRX5R6BB475-Yageo-datasheet-140260304.pdf?src-supplier=Newark, Halogen Free="Halogen Free", Height=0.5mm, Lead Free="Lead Free", Length=0.039inch, Manufacturer Part Number=CC0402MRX5R6BB475, Material=Ceramic, Mount="Surface Mount", Packaging="Tape and Reel", Pricing 1="1=0.1, 10=0.053, 50=0.0364, 100=0.0313, 500=0.0227, 1000=0.02003, 2500=0.01719, 5000=0.01547 (USD)", RoHS=Yes, RoHS Compliant=Yes, Series=CC, Stock 1=1209136, Supplier 1=Digikey, Termination=SMD/SMT, Thickness=0.022inch, Voltage Rating (DC)=10V, Weight=2.3E-05oz, Width=0.02inch
C10 C11: library part CC0402KRX7R7BB104, "Multilayer Ceramic Capacitor, 0.1 uF, 16 V, ï¿½ 10%, X7R, 0402 [1005 Metric]", Capacitance=100nF, Case Code (Imperial)=0402, Case Code (Metric)=1005, Dielectric=X7R, LCSC=C60474, Manufacturer=Yageo, Max Operating Temperature=125°C, Min Operating Temperature=-55°C, Package Quantity=1, Supplier Part Number 1=311-1338-1-ND, Temperature Coefficient=30ppm/°C, Tolerance=10%, Voltage=16V, Case/Package=0402, Category="Ceramic Capacitors", ComponentLink1Description=https://datasheet.ciiva.com/11788/0900766b80ce67ed-11788364.pdf?src-supplier=Rs, ComponentLink1URL=https://datasheet.ciiva.com/11788/0900766b80ce67ed-11788364.pdf?src-supplier=Rs, ComponentLink2Description=https://datasheet.ciiva.com/7978/1489800-7978111.pdf?src-supplier=Element14, ComponentLink2URL=https://datasheet.ciiva.com/7978/1489800-7978111.pdf?src-supplier=Element14, ComponentLink3Description=https://datasheet.ciiva.com/161/mlccorderingcode-161545.pdf?src-supplier=Digikey, ComponentLink3URL=https://datasheet.ciiva.com/161/mlccorderingcode-161545.pdf?src-supplier=Digikey, ComponentLink4Description=https://datasheet.ciiva.com/161/mlccorderingcode-161544.pdf?src-supplier=Digikey, ComponentLink4URL=https://datasheet.ciiva.com/161/mlccorderingcode-161544.pdf?src-supplier=Digikey, ComponentLink5Description=https://datasheet.ciiva.com/161/mlccorderingcode-161546.pdf?src-supplier=Digikey, ComponentLink5URL=https://datasheet.ciiva.com/161/mlccorderingcode-161546.pdf?src-supplier=Digikey, ComponentLink6Description=https://datasheet.ciiva.com/8033/1734573-8033661.pdf?src-supplier=Element14, ComponentLink6URL=https://datasheet.ciiva.com/8033/1734573-8033661.pdf?src-supplier=Element14, ComponentLink7Description=https://datasheet.ciiva.com/11587/upy-gphc-x7r-6-3v-to-50v-8-11587305.pdf?src-supplier=Avnet, ComponentLink7URL=https://datasheet.ciiva.com/11587/upy-gphc-x7r-6-3v-to-50v-8-11587305.pdf?src-supplier=Avnet, Depth=0.5mm, Halogen Free=5694HalogenFree, Height=0.5mm, Lead Free=5697LeadFree, Length=1mm, Manufacturer Part Number=CC0402KRX7R7BB104, Material=4241ConductorMaterial, Mount="Surface Mount", Number of Pins=2, Packaging="Tape and Reel", Pricing 1="1=0.1, 10=0.024, 50=0.0164, 100=0.0139, 500=0.0098, 1000=0.00852, 2500=0.00718, 5000=0.00636 (USD)", Radiation Hardening=No, Reach SVHC Compliant=No, RoHS=Yes, RoHS Compliant=Yes, Series=CC, Stock 1=15609894, Supplier 1=Digikey, Termination=SMD/SMT, Thickness=0.022inch, Voltage Rating=16V, Voltage Rating (AC)=16V, Voltage Rating (DC)=16V, Width=0.02inch
C12 C13 C14 C15 C16 C18 C19 C20 C21 C22 C24 C25 C26 C27 C28: library part CC0402KRX5R5BB105, "Multilayer Ceramic Capacitor, 1 uF, 100 V, ï¿½ 10%, X7R, 0402 [1005 Metric]", Capacitance=1uF, Case Code (Imperial)=0402, Case Code (Metric)=1005, Dielectric=X5R, Dielectric Material=Ceramic, Manufacturer=Yageo, Max Operating Temperature=85°C, Min Operating Temperature=-55°C, Supplier Part Number 1=311-1438-1-ND, Temperature Coefficient=30ppm/°C, Tolerance=10%, Voltage Rating=6.3V, Case/Package=0402, Category="Ceramic Capacitors", ComponentLink1Description=https://datasheet.ciiva.com/5789/70765-5789520.pdf?src-supplier=Farnell, ComponentLink1URL=https://datasheet.ciiva.com/5789/70765-5789520.pdf?src-supplier=Farnell, ComponentLink2Description=https://datasheet.ciiva.com/176/mlccorderingcode-176609.pdf?src-supplier=Digikey, ComponentLink2URL=https://datasheet.ciiva.com/176/mlccorderingcode-176609.pdf?src-supplier=Digikey, ComponentLink3Description=https://datasheet.ciiva.com/176/mlccorderingcode-176610.pdf?src-supplier=Digikey, ComponentLink3URL=https://datasheet.ciiva.com/176/mlccorderingcode-176610.pdf?src-supplier=Digikey, ComponentLink4Description=https://datasheet.ciiva.com/176/mlccorderingcode-176611.pdf?src-supplier=Digikey, ComponentLink4URL=https://datasheet.ciiva.com/176/mlccorderingcode-176611.pdf?src-supplier=Digikey, ComponentLink5Description=https://datasheet.ciiva.com/11464/upy-gphc-x5r-4v-to-50v-12-11464863.pdf?src-supplier=Avnet, ComponentLink5URL=https://datasheet.ciiva.com/11464/upy-gphc-x5r-4v-to-50v-12-11464863.pdf?src-supplier=Avnet, ComponentLink6Description=https://datasheet.ciiva.com/8033/1525783-8033643.pdf?src-supplier=Element14, ComponentLink6URL=https://datasheet.ciiva.com/8033/1525783-8033643.pdf?src-supplier=Element14, ComponentLink7Description=https://datasheet.ciiva.com/8033/1525783-8033644.pdf?src-supplier=Element14, ComponentLink7URL=https://datasheet.ciiva.com/8033/1525783-8033644.pdf?src-supplier=Element14, ComponentLink8Description=https://datasheet.ciiva.com/8033/70765-8033646.pdf?src-supplier=Element14, ComponentLink8URL=https://datasheet.ciiva.com/8033/70765-8033646.pdf?src-supplier=Element14, ComponentLink9Description=https://datasheet.ciiva.com/28450/1359354-28450285.pdf?src-supplier=Element14, ComponentLink9URL=https://datasheet.ciiva.com/28450/1359354-28450285.pdf?src-supplier=Element14, Depth=0.5mm, Halogen Free=5694HalogenFree, Height=0.5mm, Lead Free="Lead Free", Length=1mm, Manufacturer Part Number=CC0402KRX5R5BB105, Material=Ceramic, Mount="Surface Mount", Number of Pins=2, Packaging="Tape and Reel", Pricing 1="1=0.1, 10=0.054, 100=0.0318, 1000=0.02066, 2500=0.01646, 5000=0.01625 (USD)", Radiation Hardening=No, Reach SVHC Compliant=No, RoHS=Yes, RoHS Compliant=Yes, Series=CC, Stock 1=21136934, Supplier 1=Digikey, Termination=SMD/SMT, Voltage Rating (AC)=6.3V, Voltage Rating (DC)=6.3V, Width=0.5mm
C17 C23 C29: library part CL05A106MQ5NUNC, "Multilayer Ceramic Capacitor, 10 uF, 6.3 V, ï¿½ 20%, X5R, 0402 [1005 Metric]", Capacitance=10uF, Case Code (Imperial)=0402, Case Code (Metric)=1005, Dielectric=X5R, Manufacturer=Samsung, Max Operating Temperature=85°C, Min Operating Temperature=-55°C, Package Quantity=1, Tolerance=20%, Voltage Rating=6.3V, Case/Package=0402, Category="Ceramic Capacitors", ComponentLink1Description=https://datasheet.ciiva.com/16437/cl05a106mq5nunc-16437356.pdf?src-supplier=Future+Electronics, ComponentLink1URL=https://datasheet.ciiva.com/16437/cl05a106mq5nunc-16437356.pdf?src-supplier=Future+Electronics, ComponentLink2Description=https://datasheet.ciiva.com/26877/getdatasheetpartid-355289-26877841.pdf?src-supplier=Verical, ComponentLink2URL=https://datasheet.ciiva.com/26877/getdatasheetpartid-355289-26877841.pdf?src-supplier=Verical, Construction=Flat, Depth=0.5mm, Height=0.5mm, Length=1mm, Manufacturer Part Number=CL05A106MQ5NUNC, Mount="Surface Mount", Packaging="Tape and Reel", Pricing 1="10000=0.02499, 20000=0.02486, 40000=0.02474, 60000=0.02461, 80000=0.02448 (USD)", Radiation Hardening=No, RoHS=Yes, RoHS Compliant=Yes, Series=CL, Stock 1=540000, Supplier 1=Avnet, Supplier Part Number 1=CL05A106MQ5NUNC, Thickness=0.028inch, Width=0.02inch
C30 C31: library part GRM188R61A226ME15D, "SMD Capacitor X5R(EIA) with Capacitance: 22uF Tol. 20%. Rated Voltage: 10Vdc", Package=None, Availability=Unavailable, MP=GRM188R61A226ME15D, Price=None
L1: "Inductor Power Shielded Wirewound 0.47uH 20% 1MHz Metal 4A 0.027Ohm DCR 1008 Automotive T/R", Current Rating=4A, Inductance=470nH, Inductance Tolerance=20%, Manufacturer=Murata, Manufacturer Part Number=DFE252012PD-R47M=P2, Max Operating Temperature=125°C, Min Operating Temperature=-40°C, Saturation Current=5.2A, Series Resistance=27mR, Supplier Part Number 1=490-DFE252012PD-R47M=P2TR-ND, Test Frequency=1MHz, Category="Fixed Inductors", ComponentLink1Description=http://www.farnell.com/datasheets/2616814.pdf?src-supplier=Farnell, ComponentLink1URL=http://www.farnell.com/datasheets/2616814.pdf?src-supplier=Farnell, ComponentLink2Description=https://search.murata.co.jp/Ceramy/image/img/P02/J(E)TE243A-9102.pdf?src-supplier=Digikey, ComponentLink2URL=https://search.murata.co.jp/Ceramy/image/img/P02/J(E)TE243A-9102.pdf?src-supplier=Digikey, ComponentLink3Description=http://www.farnell.com/datasheets/2616814.pdf?src-supplier=Newark, ComponentLink3URL=http://www.farnell.com/datasheets/2616814.pdf?src-supplier=Newark, Height=1.2mm, Pricing 1="3000=0.20501, 6000=0.19333, 9000=0.18681, 15000=0.17892, 21000=0.17392, 30000=0.16876 (USD)", RMS Current (Irms)=4A, RoHS=Yes, RoHS Compliant=Yes, Stock 1=54000, Supplier 1=Digikey, Tolerance=20%
R1 R2 R3: library part RC0402JR-0710KL, "SMD Chip Resistor, 10 kOhm, ï¿½ 5%, 62.5 mW, 0402 [1005 Metric], Thick Film, General Purpose", Case Code (Imperial)=0402, Case Code (Metric)=1005, Manufacturer=Yageo, Max Operating Temperature=155°C, Max Power Dissipation=63mW, Min Operating Temperature=-55°C, Package Quantity=1, Power Rating=62.5mW, Resistance=10kR, Resistance Tolerance=5%, Resistor Type="Thick Film", Supplier Part Number 1=311-10KJRCT-ND, Temperature Coefficient=100ppm/°C, Voltage Rating=50V, Case/Package=0402, Category="Chip SMD Resistors", ComponentLink1Description=https://datasheet.ciiva.com/2452/pyu-r-int-thick-7-2452626.pdf?src-supplier=Digikey, ComponentLink1URL=https://datasheet.ciiva.com/2452/pyu-r-int-thick-7-2452626.pdf?src-supplier=Digikey, ComponentLink2Description=https://datasheet.ciiva.com/2452/pyu-r-int-thick-7-2452627.pdf?src-supplier=Digikey, ComponentLink2URL=https://datasheet.ciiva.com/2452/pyu-r-int-thick-7-2452627.pdf?src-supplier=Digikey, ComponentLink3Description=https://datasheet.ciiva.com/2452/pyu-r-int-thick-7-2452628.pdf?src-supplier=Digikey, ComponentLink3URL=https://datasheet.ciiva.com/2452/pyu-r-int-thick-7-2452628.pdf?src-supplier=Digikey, ComponentLink4Description=https://datasheet.ciiva.com/7850/1018594-7850136.pdf?src-supplier=Element14, ComponentLink4URL=https://datasheet.ciiva.com/7850/1018594-7850136.pdf?src-supplier=Element14, ComponentLink5Description=https://datasheet.ciiva.com/7850/1018594-7850137.pdf?src-supplier=Element14, ComponentLink5URL=https://datasheet.ciiva.com/7850/1018594-7850137.pdf?src-supplier=Element14, ComponentLink6Description=https://datasheet.ciiva.com/12669/pyu-rc0402-51-rohs-l-6-r-12669687.pdf?src-supplier=Mouser, ComponentLink6URL=https://datasheet.ciiva.com/12669/pyu-rc0402-51-rohs-l-6-r-12669687.pdf?src-supplier=Mouser, Construction=Rectangular, Depth=0.5mm, Features="Moisture Resistant", Height=0.016inch, Lead Free="Lead Free", Length=0.039inch, Manufacturer Part Number=RC0402JR-0710KL, Military Standard=Not, Number of Terminations=2, Packaging="Tape and Reel", Pricing 1="1=0.1, 10=0.007, 50=0.0066, 100=0.0061, 500=0.0051, 1000=0.00408, 5000=0.00284 (USD)", Reach SVHC Compliant=Unknown, RoHS=Yes, RoHS Compliant=Yes, Series=RC, Size Code=0402, Stock 1=16677034, Supplier 1=Digikey, Termination=SMD/SMT, Tolerance=5%, Voltage Rating (AC)=50V, Width=0.02inch
U2: "No Description Available", Mfr_Name=Micron, RefDes=RefDes, Type=Memory
U3: "ARMÂ® CortexÂ®-A53 Microprocessor IC i.MX8MN 4 Core, 32-Bit 1.5GHz 486-LFBGA (14x14)", Package="LFBGA-486 NXP USA Inc.", Arrow_Electronics-Purchase-URL=https://snapeda.com/shop?store=Arrow+Electronics&id=4467530, Availability=Warning, BuyPart=https://www.snapeda.com/parts/MIMX8MN6DVTJZAA/NXP%20Semiconductors/view-part/4467530/?ref=eda, MF="NXP USA Inc.", Mouser-Purchase-URL=https://snapeda.com/shop?store=Mouser&id=4467530, MP=MIMX8MN6DVTJZAA, Price=None, SnapEDA_Link=https://www.snapeda.com/parts/MIMX8MN6DVTJZAA/NXP%20Semiconductors/view-part/4467530/?ref=snap
U1: CLASS=IC

## Nets (pads, with @x,y where several pads share a name; then routed paths per layer and width w, separated by ;. In a path a pad name is that pad's centre, name@x,y a point inside that pad or via, vN(x,y) a via of type N, cw(c..) or ccw(c..) an arc to the next point about the centre after c; other vN are vias at no path point)
eMMC_VDDIM: C8.1 C9.1 U1.C2
GND: C1.2 C2.2 C3.2 C4.2 C5.2 C6.2 C7.2 C8.2 C9.2 C10.2 C11.2 C12.2 C13.2 C14.2 C15.2 C16.2 C17.2 C18.2 C19.2 C20.2 C21.2 C22.2 C23.2 C24.2 C25.2 C26.2 C27.2 C28.2 C29.2 C30.1 C31.1 U1.A6 U1.C4 U1.E7 U1.G5 U1.H10 U1.J5 U1.K8 U1.N2 U1.N5 U1.P4 U1.P6 U2.A3 U2.A10 U2.AB3 U2.AB5 U2.AB8 U2.AB10 U2.D2 U2.D4 U2.D9 U2.D11 U2.E1 U2.E5 U2.E8 U2.E12 U3.A1 U3.A27 U3.AA7 U3.AA9 U3.AA10 U3.AA13 U3.AA18 U3.AA19 U3.AA21 U3.AB3 U3.AB25 U3.AC3 U3.AC25 U3.AE2 U3.AE5 U3.AE6 U3.AE9 U3.AE10 U3.AE13 U3.AE14 U3.AE15 U3.AE18 U3.AE19 U3.AE22 U3.AE23 U3.AF3 U3.AG1 U3.AG27 U3.B3 U3.B26 U3.C2 U3.C5 U3.C6 U3.C9 U3.C10 U3.C13 U3.C14 U3.C15 U3.C18 U3.C19 U3.C22 U3.C23 U3.E3 U3.E25 U3.F3 U3.F25 U3.G7 U3.G9 U3.G10 U3.G13 U3.G15 U3.G18 U3.G19 U3.G21 U3.H2 U3.H18 U3.J3 U3.J7 U3.J21 U3.J25 U3.K3 U3.K7 U3.K20 U3.K21 U3.K25 U3.L12 U3.L16 U3.M12 U3.M16 U3.N3 U3.N7 U3.N12 U3.N16 U3.N21 U3.N25 U3.P3 U3.P13 U3.P15 U3.P21 U3.P25 U3.R3 U3.R7 U3.R12 U3.R16 U3.R20 U3.R21 U3.R25 U3.T12 U3.T16 U3.U12 U3.U16 U3.V3 U3.V7 U3.V21 U3.V25 U3.W3 U3.W7 U3.W21 U3.W25 U3.Y2 U3.Y13 U3.Y18
Net*_36: *.36 *.37 L1.1
NetC30_2: C30.2 C31.2 L1.2
NetU2_A4: U2.A4 U2.A9 U2.AB4 U2.AB9
NetU2_B3: U2.B3 U2.B5 U2.B8
NetU2_B12: U2.B12 U2.C1
NetU2_C5: U2.C5 U2.C8 U2.C12
NetU2_F1: U2.F1 U2.G4 U2.G9
NetU2_G1: U2.G1 U2.G3 U2.G5 U2.G8 U2.G10 U2.G12
NVCC_DRAM_1V1: U2.AA3 U2.AA5 U2.AA8 U2.AA10 U2.D1 U2.D5 U2.D8 U2.D12 U2.F3 U2.F5 U2.F8 U2.F10 U2.F12 U2.H1 U2.H5 U2.H8 U2.H12
NVCC_SNVS_1V8: U3.J22
QSPIA_DATA0: 
QSPIA_DATA1: 
QSPIA_DATA2: 
QSPIA_DATA3: 
QSPIA_nSS0: R3.2
QSPIA_SCLK: 
SD1_CLK: U1.M6
SD1_CMD: R2.2 U1.M5
SD1_DATA0: R1.2 U1.A3
SD1_DATA1: U1.A4
SD1_DATA2: U1.A5
SD1_DATA3: U1.B2
SD1_DATA4: U1.B3
SD1_DATA5: U1.B4
SD1_DATA6: U1.B5
SD1_DATA7: U1.B6
SD1_RESET_B: U1.K5
SD1_STROBE: U1.H5
VDD_1V8: C4.1 C5.1 C6.1 C7.1 C10.1 C11.1 R1.1 R2.1 R3.1 U1.C6 U1.M4 U1.N4 U1.P3 U1.P5
VDD_3V3: C1.1 C2.1 C3.1 U1.E6 U1.F5 U1.J10 U1.K9
VDD_ARM_0V9: C12.1 C13.1 C14.1 C15.1 C16.1 C17.1 U3.R13 U3.R15 U3.T13 U3.T14 U3.T15 U3.U13 U3.U15 U3.V13 U3.V15 U3.V16 U3.W13 U3.W14 U3.W15 U3.W16
VDD_SOC&DRAM&PU_0V9: C18.1 C19.1 C20.1 C21.1 C22.1 C23.1 C24.1 C25.1 C26.1 C27.1 C28.1 C29.1 U3.J10 U3.K15 U3.K16 U3.L10 U3.L15 U3.L18 U3.M15 U3.N10 U3.N13 U3.N15 U3.N18 U3.P12 U3.R10 U3.R11 U3.R17 U3.R18 U3.U10 U3.U11 U3.U17 U3.U18 U3.V12 U3.W10 U3.W11
VSYS_5V: *.16 *.17 *.18 *.33 *.34 *.35 *.47 *.48 *.49
pads on no net: *.1 *.2 *.3 *.4 *.5 *.6 *.7 *.8 *.9 *.10 *.11 *.12 *.13 *.14 *.15 *.19 *.20 *.21 *.22 *.23 *.24 *.25 *.26 *.27 *.28 *.29 *.30 *.31 *.32 *.38 *.39 *.40 *.41 *.42 *.43 *.44 *.45 *.46 *.50 *.51 *.52 *.53 *.54 *.55 *.56 *.57 U1.A1 U1.A2 U1.A7 U1.A8 U1.A9 U1.A10 U1.A11 U1.A12 U1.A13 U1.A14 U1.B1 U1.B7 U1.B8 U1.B9 U1.B10 U1.B11 U1.B12 U1.B13 U1.B14 U1.C1 U1.C3 U1.C5 U1.C7 U1.C8 U1.C9 U1.C10 U1.C11 U1.C12 U1.C13 U1.C14 U1.D1 U1.D2 U1.D3 U1.D4 U1.D12 U1.D13 U1.D14 U1.E1 U1.E2 U1.E3 U1.E5 U1.E8 U1.E9 U1.E10 U1.E12 U1.E13 U1.E14 U1.F1 U1.F2 U1.F3 U1.F10 U1.F12 U1.F13 U1.F14 U1.G1 U1.G2 U1.G3 U1.G10 U1.G12 U1.G13 U1.G14 U1.H1 U1.H2 U1.H3 U1.H12 U1.H13 U1.H14 U1.J1 U1.J2 U1.J3 U1.J12 U1.J13 U1.J14 U1.K1 U1.K2 U1.K3 U1.K6 U1.K7 U1.K10 U1.K12 U1.K13 U1.K14 U1.L1 U1.L2 U1.L3 U1.L12 U1.L13 U1.L14 U1.M1 U1.M2 U1.M3 U1.M7 U1.M8 U1.M9 U1.M10 U1.M11 U1.M12 U1.M13 U1.M14 U1.N1 U1.N3 U1.N6 U1.N7 U1.N8 U1.N9 U1.N10 U1.N11 U1.N12 U1.N13 U1.N14 U1.P1 U1.P2 U1.P7 U1.P8 U1.P9 U1.P10 U1.P11 U1.P12 U1.P13 U1.P14 U2.A1 U2.A2 U2.A5 U2.A8 U2.A11 U2.A12 U2.AA1 U2.AA2 U2.AA4 U2.AA9 U2.AA11 U2.AA12 U2.AB1 U2.AB2 U2.AB11 U2.AB12 U2.B1 U2.B2 U2.B4 U2.B9 U2.B10 U2.B11 U2.C2 U2.C3 U2.C4 U2.C9 U2.C10 U2.C11 U2.D3 U2.D10 U2.E2 U2.E3 U2.E4 U2.E9 U2.E10 U2.E11 U2.F2 U2.F4 U2.F9 U2.F11 U2.G2 U2.G11 U2.H2 U2.H3 U2.H4 U2.H9 U2.H10 U2.H11 U2.J1 U2.J2 U2.J3 U2.J4 U2.J5 U2.J8 U2.J9 U2.J10 U2.J11 U2.J12 U2.K1 U2.K2 U2.K3 U2.K4 U2.K5 U2.K8 U2.K9 U2.K10 U2.K11 U2.K12 U2.N1 U2.N2 U2.N3 U2.N4 U2.N5 U2.N8 U2.N9 U2.N10 U2.N11 U2.N12 U2.P1 U2.P2 U2.P3 U2.P4 U2.P5 U2.P8 U2.P9 U2.P10 U2.P11 U2.P12 U2.R1 U2.R2 U2.R3 U2.R4 U2.R5 U2.R8 U2.R9 U2.R10 U2.R11 U2.R12 U2.T1 U2.T2 U2.T3 U2.T4 U2.T5 U2.T8 U2.T9 U2.T10 U2.T11 U2.T12 U2.U1 U2.U2 U2.U3 U2.U4 U2.U5 U2.U8 U2.U9 U2.U10 U2.U11 U2.U12 U2.V1 U2.V2 U2.V3 U2.V4 U2.V5 U2.V8 U2.V9 U2.V10 U2.V11 U2.V12 U2.W1 U2.W2 U2.W3 U2.W4 U2.W5 U2.W8 U2.W9 U2.W10 U2.W11 U2.W12 U2.Y1 U2.Y2 U2.Y3 U2.Y4 U2.Y5 U2.Y8 U2.Y9 U2.Y10 U2.Y11 U2.Y12 U3.A2 U3.A3 U3.A4 U3.A5 U3.A6 U3.A7 U3.A8 U3.A9 U3.A10 U3.A11 U3.A12 U3.A13 U3.A14 U3.A15 U3.A16 U3.A17 U3.A18 U3.A19 U3.A20 U3.A21 U3.A22 U3.A23 U3.A24 U3.A25 U3.A26 U3.AA1 U3.AA2 U3.AA14 U3.AA15 U3.AA26 U3.AA27 U3.AB1 U3.AB2 U3.AB4 U3.AB5 U3.AB6 U3.AB9 U3.AB10 U3.AB13 U3.AB15 U3.AB18 U3.AB19 U3.AB22 U3.AB23 U3.AB24 U3.AB26 U3.AB27 U3.AC1 U3.AC2 U3.AC4 U3.AC6 U3.AC9 U3.AC10 U3.AC13 U3.AC14 U3.AC15 U3.AC18 U3.AC19 U3.AC22 U3.AC24 U3.AC26 U3.AC27 U3.AD1 U3.AD2 U3.AD5 U3.AD6 U3.AD9 U3.AD10 U3.AD13 U3.AD15 U3.AD18 U3.AD19 U3.AD22 U3.AD23 U3.AD26 U3.AD27 U3.AE1 U3.AE26 U3.AE27 U3.AF1 U3.AF2 U3.AF4 U3.AF5 U3.AF6 U3.AF7 U3.AF8 U3.AF9 U3.AF10 U3.AF11 U3.AF12 U3.AF13 U3.AF14 U3.AF15 U3.AF16 U3.AF17 U3.AF18 U3.AF19 U3.AF20 U3.AF21 U3.AF22 U3.AF23 U3.AF24 U3.AF25 U3.AF26 U3.AF27 U3.AG2 U3.AG3 U3.AG4 U3.AG5 U3.AG6 U3.AG7 U3.AG8 U3.AG9 U3.AG10 U3.AG11 U3.AG12 U3.AG13 U3.AG14 U3.AG15 U3.AG16 U3.AG17 U3.AG18 U3.AG19 U3.AG20 U3.AG21 U3.AG22 U3.AG23 U3.AG24 U3.AG25 U3.AG26 U3.B1 U3.B2 U3.B4 U3.B5 U3.B6 U3.B7 U3.B8 U3.B9 U3.B10 U3.B11 U3.B12 U3.B13 U3.B14 U3.B15 U3.B16 U3.B17 U3.B18 U3.B19 U3.B20 U3.B21 U3.B22 U3.B23 U3.B24 U3.B25 U3.B27 U3.C1 U3.C26 U3.C27 U3.D1 U3.D2 U3.D5 U3.D6 U3.D9 U3.D10 U3.D13 U3.D15 U3.D18 U3.D19 U3.D22 U3.D23 U3.D26 U3.D27 U3.E1 U3.E2 U3.E4 U3.E6 U3.E9 U3.E10 U3.E13 U3.E14 U3.E15 U3.E18 U3.E19 U3.E22 U3.E24 U3.E26 U3.E27 U3.F1 U3.F2 U3.F4 U3.F5 U3.F6 U3.F9 U3.F10 U3.F13 U3.F15 U3.F18 U3.F19 U3.F22 U3.F23 U3.F24 U3.F26 U3.F27 U3.G1 U3.G2 U3.G14 U3.G26 U3.G27 U3.H1 U3.H10 U3.H13 U3.H15 U3.H26 U3.H27 U3.J1 U3.J2 U3.J4 U3.J5 U3.J6 U3.J11 U3.J12 U3.J13 U3.J14 U3.J15 U3.J16 U3.J17 U3.J18 U3.J23 U3.J24 U3.J26 U3.J27 U3.K1 U3.K2 U3.K4 U3.K5 U3.K6 U3.K8 U3.K9 U3.K12 U3.K13 U3.K19 U3.K22 U3.K23 U3.K24 U3.K26 U3.K27 U3.L1 U3.L2 U3.L9 U3.L11 U3.L13 U3.L17 U3.L19 U3.L26 U3.L27 U3.M1 U3.M2 U3.M9 U3.M13 U3.M14 U3.M19 U3.M26 U3.M27 U3.N1 U3.N2 U3.N4 U3.N5 U3.N6 U3.N8 U3.N9 U3.N11 U3.N17 U3.N19 U3.N20 U3.N22 U3.N23 U3.N24 U3.N26 U3.N27 U3.P1 U3.P2 U3.P5 U3.P7 U3.P9 U3.P16 U3.P19 U3.P23 U3.P26 U3.P27 U3.R1 U3.R2 U3.R4 U3.R5 U3.R6 U3.R8 U3.R9 U3.R19 U3.R22 U3.R23 U3.R24 U3.R26 U3.R27 U3.T1 U3.T2 U3.T9 U3.T19 U3.T26 U3.T27 U3.U1 U3.U2 U3.U9 U3.U19 U3.U26 U3.U27 U3.V1 U3.V2 U3.V4 U3.V5 U3.V6 U3.V8 U3.V9 U3.V19 U3.V20 U3.V22 U3.V23 U3.V24 U3.V26 U3.V27 U3.W1 U3.W2 U3.W4 U3.W5 U3.W6 U3.W12 U3.W17 U3.W18 U3.W22 U3.W23 U3.W24 U3.W26 U3.W27 U3.Y1 U3.Y10 U3.Y15 U3.Y26 U3.Y27

## Text inside footprints (layer, text, board x,y; h text height)
U2: Top Overlay "12" at 3436.97,2568.8 h50 r90; Top Overlay "1" at 3090.51,2568.8 h50 r90; Top Overlay "AB" at 2964.74,1962.61 h50; Top Overlay "A" at 2989.74,2500 h50; Mechanical 13 "12" at 3436.97,2568.8 h50 r90; Mechanical 13 "1" at 3090.51,2568.8 h50 r90; Mechanical 13 "AB" at 2964.74,1962.61 h50; Mechanical 13 "A" at 2989.74,2500 h50; Bottom Overlay "12" at 3386.97,2568.8 h50 r270; Bottom Overlay "1" at 3040.51,2568.8 h50 r270; Bottom Overlay "AB" at 3014.74,1962.61 h50; Bottom Overlay "A" at 3014.74,2500 h50